# EAGLE board CT_schematic (EAGLE 7.6.0)

Size 100 x 80 mm. Coordinates in mm from the lower left corner, seen from the top.
Outline: 0,0 100,0 100,80 0,80 0,0
Copper layers (1*16): Top 0.035mm / dielectric 1.5mm / Bottom 0.035mm
Design rules "default": minimum track width 10mil, minimum drill 24mil, track to track 8mil, track to pad 8mil, pad to pad 8mil, via to via 8mil, smd to smd 8mil, copper to edge 40mil, drill to drill 8mil, minimum pad ring 10mil, minimum via ring 8mil, stop-mask expansion 4mil, vias tented up to drill 0mil, thermal gap 10mil

## Footprints (pad centres in the part's own frame; a part is rotated, then mirrored left to right if it is on the bottom)
C0603 = smd 0.8 x 0.8: 1 -0.762,0; 2 0.762,0
C0402 = smd 0.5 x 0.5: 1 -0.508,0; 2 0.508,0
C0805 = smd 1.2 x 1.3: 1 -1.016,0; 2 1.016,0
C1210 = smd 1.2 x 2.5: 1 -1.524,0; 2 1.524,0
C1206 = smd 1.3 x 1.6: 1 -1.524,0; 2 1.524,0
L0603 = smd 0.8 x 0.8: 1 -0.762,0; 2 0.762,0
L1210 = smd 1.2 x 2.5: 1 -1.524,0; 2 1.524,0
R0603 = smd 0.8 x 0.8: 1 -0.762,0; 2 0.762,0
WLCSP36 = smd 0.229 x 0.229: A1 -1,1; A2 -0.6,1; A3 -0.2,1; A4 0.2,1; A5 0.6,1; A6 1,1; B1 -1,0.6; B2 -0.6,0.6; B3 -0.2,0.6; B4 0.2,0.6; B5 0.6,0.6; B6 1,0.6; C1 -1,0.2; C2 -0.6,0.2; C3 -0.2,0.2; C4 0.2,0.2; C5 0.6,0.2; C6 1,0.2; D1 -1,-0.2; D2 -0.6,-0.2; D3 -0.2,-0.2; D4 0.2,-0.2; D5 0.6,-0.2; D6 1,-0.2; E1 -1,-0.6; E2 -0.6,-0.6; E3 -0.2,-0.6; E4 0.2,-0.6; E5 0.6,-0.6; E6 1,-0.6; F1 -1,-1; F2 -0.6,-1; F3 -0.2,-1; F4 0.2,-1; F5 0.6,-1; F6 1,-1
SOIC-8 = smd 1.6 x 0.6: 1 -2.7,1.905 | smd 1.55 x 0.6: 2 -2.7,0.635; 3 -2.7,-0.635; 4 -2.7,-1.905; 5 2.7,-1.905; 6 2.7,-0.635; 7 2.7,0.635; 8 2.7,1.905
SSOP-20 = smd 1.651 x 0.432: 1 -3.48,2.925; 2 -3.48,2.275; 3 -3.48,1.625; 4 -3.48,0.975; 5 -3.48,0.325; 6 -3.48,-0.325; 7 -3.48,-0.975; 8 -3.48,-1.625; 9 -3.48,-2.275; 10 -3.48,-2.925; 11 3.48,-2.925; 12 3.48,-2.275; 13 3.48,-1.625; 14 3.48,-0.975; 15 3.48,-0.325; 16 3.48,0.325; 17 3.48,0.975; 18 3.48,1.625; 19 3.48,2.275; 20 3.48,2.925
HTSS-105-01-G-D = drill 1 pad 1.8 square: 1 0,0 | drill 1 pad 1.8: 2 0,2.54; 3 2.54,0; 4 2.54,2.54; 5 5.08,0; 6 5.08,2.54; 7 7.62,0; 8 7.62,2.54; 9 10.16,0; 10 10.16,2.54
QFN24_2 = smd 0.6 x 0.2: 1 -1.6,1; 2 -1.6,0.6; 3 -1.6,0.2; 4 -1.6,-0.2; 5 -1.6,-0.6; 6 -1.6,-1; 13 1.6,-1; 14 1.6,-0.6; 15 1.6,-0.2; 16 1.6,0.2; 17 1.6,0.6; 18 1.6,1 | smd 0.2 x 0.6: 7 -1,-1.6; 8 -0.6,-1.6; 9 -0.2,-1.6; 10 0.2,-1.6; 11 0.6,-1.6; 12 1,-1.6; 19 1,1.6; 20 0.6,1.6; 21 0.2,1.6; 22 -0.2,1.6; 23 -0.6,1.6; 24 -1,1.6 | smd 1.75 x 1.59: 25 0,0
ASEK = smd 1.4 x 1: 1 -1.1,-0.8; 2 1.1,-0.8; 3 1.1,0.8; 4 -1.1,0.8
SOIC-8_EP = smd 1.6 x 0.533: 1 -2.921,1.905; 2 -2.921,0.635; 3 -2.921,-0.635; 4 -2.921,-1.905; 5 2.921,-1.905; 6 2.921,-0.635; 7 2.921,0.635; 8 2.921,1.905 | smd 2.54 x 3.302: EPAD 0,0 | drill 0.406 pad 0.406: P$1 -0.508,0.635; P$2 0.381,0.635; P$3 -0.508,-0.635; P$4 0.381,-0.635
DFN8_2X3MC = smd 0.813 x 0.305: 1 -1.398,0.75; 2 -1.398,0.25; 3 -1.398,-0.25; 4 -1.398,-0.75; 5 1.398,-0.75; 6 1.398,-0.25; 7 1.398,0.25; 8 1.398,0.75 | smd 1.753 x 1.549: 9 0,0
JST-2-SMD = smd 1 x 4.6: 1 -1,-3.7; 2 1,-3.7 | smd 1.6 x 3.4: NC1 -3.4,1.5; NC2 3.4,1.5
FCI_10118193-0001LF = smd 0.4 x 1.35: 1 -1.3,2.675; 2 -0.65,2.675; 3 0,2.675; 4 0.65,2.675; 5 1.3,2.675 | smd 1.6 x 1.4: 6 -3.2,2.45; 7 3.2,2.45 | smd 1.9 x 1.9: 8 -1.2,0; 9 1.2,0 | hole 0.5: -3.3,0; 3.3,0
SON-6 = smd 0.55 x 0.3: 1 -0.355,0.5 | smd 0.52 x 0.3: 2 -0.37,0; 3 -0.37,-0.5; 4 0.37,-0.5; 5 0.37,0; 6 0.37,0.5
SW_4-1437565-2 = smd 1.4 x 2.1: 1 -2.23,4.55; 2 -2.23,-4.55; 3 2.23,4.55; 4 2.23,-4.55
LGM67K-G1J2-24-Z = smd 0.8 x 1.4: A -2,0; C 0,0
NC7SZ125M5X = smd 1.3 x 0.7: 1 -1.3,0.95; 2 -1.3,0; 3 -1.3,-0.95; 4 1.3,-0.95; 5 1.3,0.95

## Placement (x,y rotation side)
C1  1e-07  [C0603]  -38.1,53.34 0 top  (outside the outline)
C2  1e-07  [C0603]  -41.91,53.34 0 top  (outside the outline)
C3  1e-07  [C0603]  -45.72,53.34 0 top  (outside the outline)
C4  1e-07  [C0603]  -49.53,53.34 0 top  (outside the outline)
C5  4.7e-06  [C0603]  -34.29,53.34 0 top  (outside the outline)
C6  1e-08  [C0603]  -53.34,53.34 0 top  (outside the outline)
C7  1e-06  [C0603]  -57.15,53.34 0 top  (outside the outline)
C8  1e-08  [C0402]  -57.15,58.42 0 top  (outside the outline)
C9  1e-06  [C0603]  -60.96,53.34 0 top  (outside the outline)
C10  1e-06  [C0603]  -15.24,58.42 0 top  (outside the outline)
C11  1e-06  [C0603]  -19.05,58.42 0 top  (outside the outline)
C12  4.7e-06  [C0805]  -40.64,41.91 0 top  (outside the outline)
C13  1e-07  [C0402]  -60.96,58.42 0 top  (outside the outline)
C14  1e-07  [C0402]  -15.24,63.5 0 top  (outside the outline)
C15  1e-08  [C0402]  -19.05,63.5 0 top  (outside the outline)
C16  1e-08  [C0402]  -22.86,63.5 0 top  (outside the outline)
C17  1e-05  [C1210]  -29.21,35.56 0 top  (outside the outline)
C18  1e-05  [C1210]  -35.56,35.56 0 top  (outside the outline)
C19  1e-05  [C1210]  -41.91,35.56 0 top  (outside the outline)
C20  1e-05  [C1210]  -48.26,35.56 0 top  (outside the outline)
C21  1e-07  [C0402]  -26.67,63.5 0 top  (outside the outline)
C22  1e-05  [C1206]  -22.86,41.91 0 top  (outside the outline)
C23  1e-05  [C1206]  -29.21,41.91 0 top  (outside the outline)
C24  1e-08  [C0402]  -30.48,63.5 0 top  (outside the outline)
F1  240.0  [L0603]  -22.86,58.42 0 top  (outside the outline)
I1  1.5e-05  [L1210]  -54.61,35.56 0 top  (outside the outline)
R1  10000.0  [R0603]  -35.56,48.26 0 top  (outside the outline)
R2  1000.0  [R0603]  -26.67,58.42 0 top  (outside the outline)
R3  1600.5  [R0603]  -30.48,58.42 0 top  (outside the outline)
R4  4700.0  [R0603]  -34.29,58.42 0 top  (outside the outline)
R5  2200.0  [R0603]  -38.1,58.42 0 top  (outside the outline)
R6  2200.0  [R0603]  -41.91,58.42 0 top  (outside the outline)
R7  10000.0  [R0603]  -40.64,48.26 0 top  (outside the outline)
R8  10000.0  [R0603]  -45.72,48.26 0 top  (outside the outline)
R9  10000.0  [R0603]  -50.8,48.26 0 top  (outside the outline)
R10  10000.0  [R0603]  -55.88,48.26 0 top  (outside the outline)
R11  100000.0  [R0603]  -59.69,41.91 0 top  (outside the outline)
R12  100000.0  [R0603]  -15.24,48.26 0 top  (outside the outline)
R13  100000.0  [R0603]  -20.32,48.26 0 top  (outside the outline)
R14  10000.0  [R0603]  -60.96,48.26 0 top  (outside the outline)
R15  10000.0  [R0603]  -15.24,53.34 0 top  (outside the outline)
R16  4031.5447154472  [R0603]  -54.61,41.91 0 top  (outside the outline)
R17  2200.0  [R0603]  -45.72,58.42 0 top  (outside the outline)
R18  10000.0  [R0603]  -20.32,53.34 0 top  (outside the outline)
R19  10000.0  [R0603]  -25.4,53.34 0 top  (outside the outline)
R20  9100.0  [R0603]  -49.53,58.42 0 top  (outside the outline)
R21  680000.0  [R0603]  -25.4,48.26 0 top  (outside the outline)
R22  120000.0  [R0603]  -30.48,48.26 0 top  (outside the outline)
R23  2000.0  [R0603]  -53.34,58.42 0 top  (outside the outline)
R24  10000.0  [R0603]  -30.48,53.34 0 top  (outside the outline)
U1  STM32L051T6Y6TR  [WLCSP36]  -15.24,41.91 0 top  (outside the outline)
U2  AT25256B-SSHL-T  [SOIC-8]  -43.18,17.78 0 top  (outside the outline)
U3  MAX3218EAP+T  [SSOP-20]  -53.34,16.51 0 top  (outside the outline)
U4  HTSS-105-01-G-D  [HTSS-105-01-G-D]  -27.94,16.51 0 top  (outside the outline)
U5  MPU-9250  [QFN24_2]  -45.72,41.91 0 top  (outside the outline)
U6  ASEK-32.768KHz-ECST  [ASEK]  -40.64,26.67 0 top  (outside the outline)
U7  MIC5234YME  [SOIC-8_EP]  -48.26,25.4 0 top  (outside the outline)
U8  MCP73831T-2ACI/MC  [DFN8_2X3MC]  -39.37,62.23 0 top  (outside the outline)
U9  S2B-PH-SM4-TB(LF)(SN)  [JST-2-SMD]  -41.91,6.35 0 top  (outside the outline)
U10  10118193-0001LF  [FCI_10118193-0001LF]  -19.05,26.67 0 top  (outside the outline)
U11  TPS3895ADRYR  [SON-6]  -33.02,62.23 0 top  (outside the outline)
U12  4-1437565-2  [SW_4-1437565-2]  -27.94,6.35 0 top  (outside the outline)
U13  Q65110A2395  [LGM67K-G1J2-24-Z]  -17.78,35.56 0 top  (outside the outline)
U14  nc7sz125m5x  [NC7SZ125M5X]  -34.29,40.64 0 top  (outside the outline)

## Library data of the parts
C1-C24 F1 I1 R1-R24 U1-U14 = circuit_tree

## Nets
CLK_U1_A6: U1.A6 U6.3
GND: C1.2 C2.2 C3.2 C4.2 C5.2 C6.2 C7.2 C8.2 C9.2 C10.2 C11.2 C13.2 C14.2 C15.2 C16.2 C17.2 C18.2 C19.2 C20.2 C21.2 C22.2 C23.2 C24.2 R2.2 R7.2 R17.2 R20.2 R22.2 R23.2 U1.D6 U2.4 U3.5 U3.17 U3.20 U4.9 U5.18 U5.20 U5.25 U6.2 U7.7 U7.EPAD U8.6 U8.9 U9.2 U10.5 U10.6 U10.7 U10.8 U10.9 U11.2 U13.C U14.1 U14.3
INPUT_USBPOWER_5V: C22.1 R24.2 U8.1 U8.2 U10.1
NET_U1_A4: R6.1 U1.A4 U5.24
NET_U1_B4: R5.1 U1.B4 U5.23
NET_U1_C5: R7.1 U1.C5
NET_U1_C6: R4.1 U1.C6 U14.4
NET_U1_D5: C6.1 C7.1 F1.1 U1.D5 U1.E6
NET_U1_F5: R3.1 U1.F5 U13.A
NET_U1_F6: R1.1 U1.F6 U12.3 U12.4
NET_U2_3: R8.1 U2.3
NET_U2_7: R10.1 U2.7
NET_U3_1: I1.1 U3.1
NET_U3_2: R11.1 U3.2
NET_U3_3: R12.1 U3.3
NET_U3_4: R13.1 U3.4
NET_U3_15: C11.1 U3.15
NET_U3_16: C12.2 U3.16
NET_U3_18: C12.1 U3.18
NET_U3_19: C10.1 U3.19
NET_U4_3: U3.12 U4.3
NET_U4_4: U3.11 U4.4
NET_U4_5: U3.14 U4.5
NET_U4_6: U3.13 U4.6
NET_U5_9: R15.1 U5.9
NET_U5_10: C13.1 U5.10
NET_U5_22: R14.1 U5.22
NET_U7_4: R16.2 R17.1 U7.4
NET_U8_5: R24.1 U8.5
NET_U8_8: R23.1 U8.8
NET_U11_1: R19.1 R20.1 U11.1
NET_U11_3: R21.2 R22.1 U11.3
NET_U11_4: R18.1 U11.4 U14.2
NET_U12_1: R2.1 U12.1 U12.2
PROC_GPIO_TO_U5_FSYNC: U1.B2 U5.11
PROC_GPIO_TO_U5_INT_B: U1.A1 U5.12
PROC_LPUART1_CTS: U1.E3 U3.8
PROC_LPUART1_RTS: U1.C3 U3.10
PROC_LPUART1_RX: U1.D2 U3.9
PROC_LPUART1_TX: U1.E2 U3.7
PROC_SPI1_MISO: U1.A3 U2.2
PROC_SPI1_MOSI: U1.B1 U2.5
PROC_SPI1_NSS: R9.1 U1.A2 U2.1
PROC_SPI1_SCK: U1.B3 U2.6
VCC_S1_3V7: C17.1 C18.1 C23.1 U7.5 U7.8 U8.3 U8.4 U9.1
VCC_TIER1_3V3: C1.1 C2.1 C3.1 C4.1 C5.1 C8.1 C9.1 C14.1 C15.1 C16.1 C19.1 C20.1 C21.1 C24.1 F1.2 I1.2 R1.2 R3.2 R4.2 R5.2 R6.2 R8.2 R9.2 R10.2 R11.2 R12.2 R13.2 R14.2 R15.2 R16.1 R18.2 R19.2 R21.1 U1.A5 U1.F1 U2.8 U3.6 U5.1 U5.8 U5.13 U6.4 U7.1 U11.6 U14.5

## Tracks (layer width: path | path; a pad name or v marks a point on that pad's centre or on a via)
CLK_U1_A6  (1 unrouted)
GND  (52 unrouted)
INPUT_USBPOWER_5V  (4 unrouted)
NET_U1_A4  (2 unrouted)
NET_U1_B4  (2 unrouted)
NET_U1_C5  (1 unrouted)
NET_U1_C6  (2 unrouted)
NET_U1_D5  (4 unrouted)
NET_U1_F5  (2 unrouted)
NET_U1_F6  (3 unrouted)
NET_U2_3  (1 unrouted)
NET_U2_7  (1 unrouted)
NET_U3_1  (1 unrouted)
NET_U3_2  (1 unrouted)
NET_U3_3  (1 unrouted)
NET_U3_4  (1 unrouted)
NET_U3_15  (1 unrouted)
NET_U3_16  (1 unrouted)
NET_U3_18  (1 unrouted)
NET_U3_19  (1 unrouted)
NET_U4_3  (1 unrouted)
NET_U4_4  (1 unrouted)
NET_U4_5  (1 unrouted)
NET_U4_6  (1 unrouted)
NET_U5_9  (1 unrouted)
NET_U5_10  (1 unrouted)
NET_U5_22  (1 unrouted)
NET_U7_4  (2 unrouted)
NET_U8_5  (1 unrouted)
NET_U8_8  (1 unrouted)
NET_U11_1  (2 unrouted)
NET_U11_3  (2 unrouted)
NET_U11_4  (2 unrouted)
NET_U12_1  (2 unrouted)
PROC_GPIO_TO_U5_FSYNC  (1 unrouted)
PROC_GPIO_TO_U5_INT_B  (1 unrouted)
PROC_LPUART1_CTS  (1 unrouted)
PROC_LPUART1_RTS  (1 unrouted)
PROC_LPUART1_RX  (1 unrouted)
PROC_LPUART1_TX  (1 unrouted)
PROC_SPI1_MISO  (1 unrouted)
PROC_SPI1_MOSI  (1 unrouted)
PROC_SPI1_NSS  (2 unrouted)
PROC_SPI1_SCK  (1 unrouted)
VCC_S1_3V7  (7 unrouted)
VCC_TIER1_3V3  (43 unrouted)